# Altium PCB bootleg-2.PcbDoc (part 2 of 2)
Units mm, origin at the board's own origin, x right, y up, seen from the top; angles counter-clockwise.
Board outline 284.8 x 94.3 mm, 2 copper layers (Component Side, Bottom Layer), stack 1.571 mm thick; 153 components, 101 nets, 573 pads, 48 vias.
Unrouted connection lines stored in the file: 2.
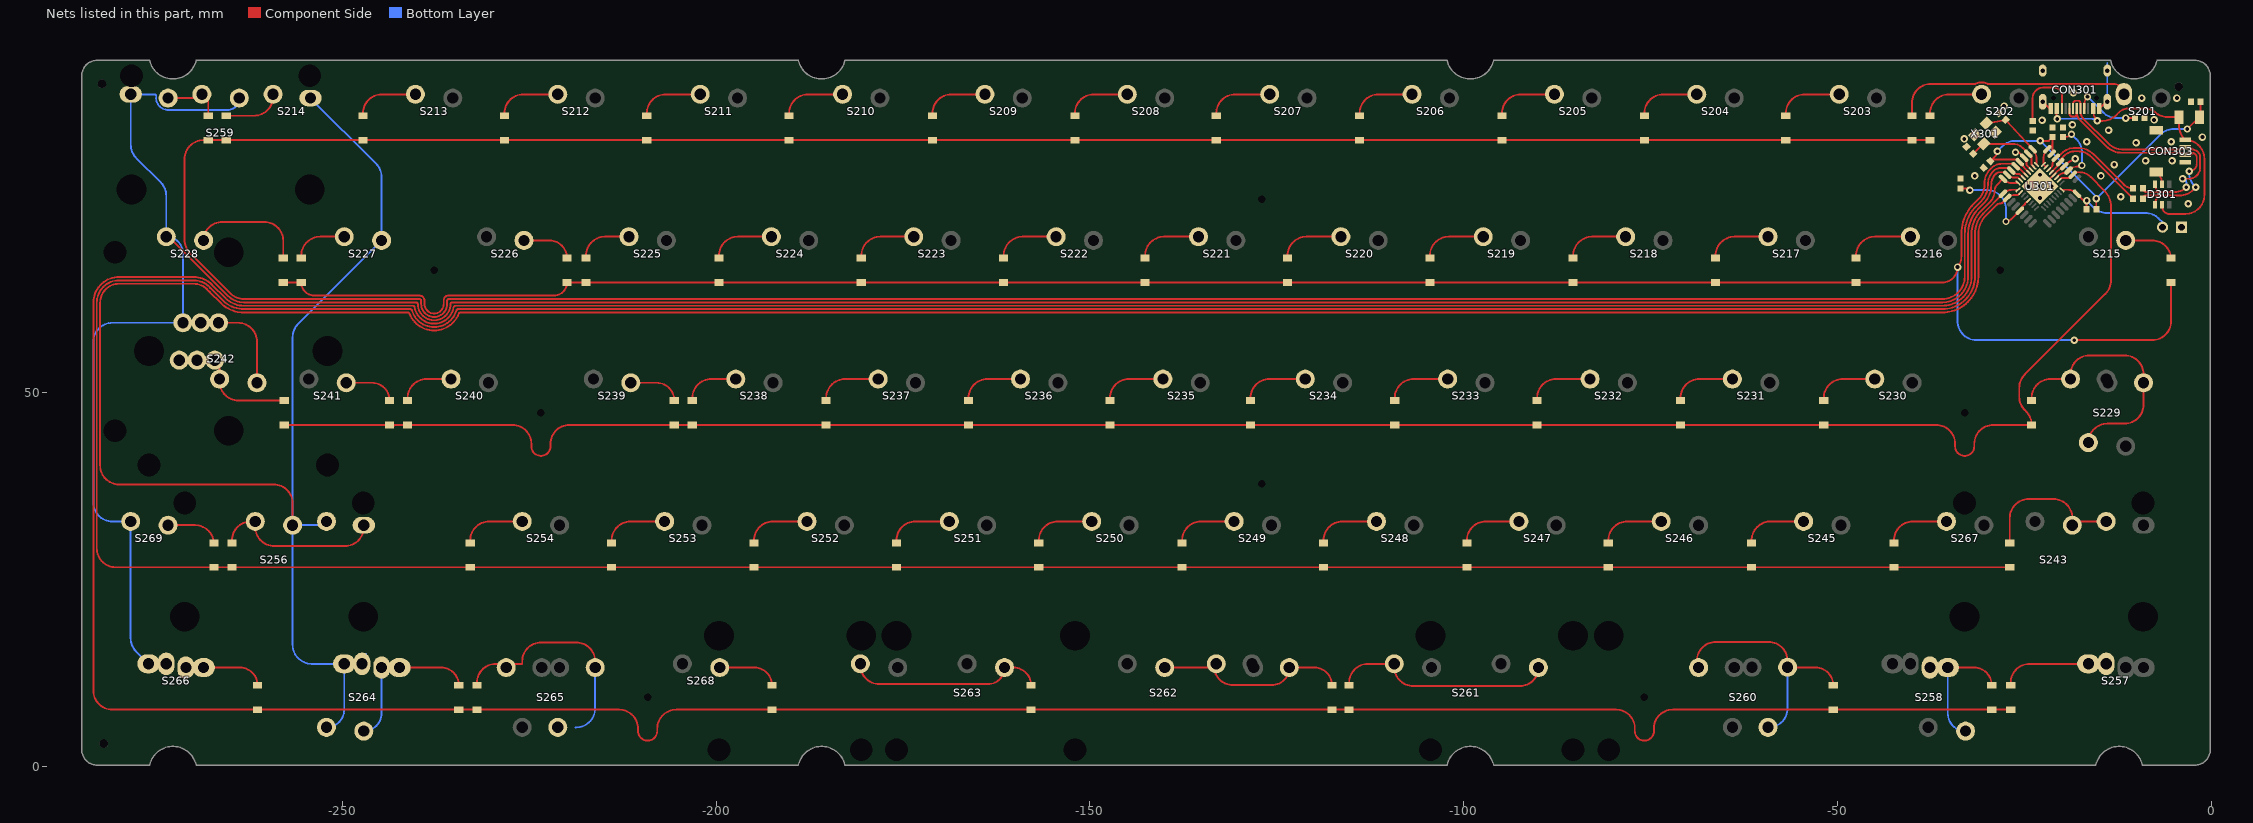
[diagram p2: the nets of this part, all layers, seen from the top]

## Via types
v1: diameter 1, hole 0.5, Component Side to Bottom Layer, tented both sides, 43 vias
v2: diameter 1, hole 0.5, Component Side to Bottom Layer, tented bottom, 5 vias

## Nets (pads, with @x,y where several pads share a name; then routed paths per layer and width w, separated by ;. In a path a pad name is that pad's centre, name@x,y a point inside that pad or via, vN(x,y) a via of type N, cw(c..) or ccw(c..) an arc to the next point about the centre after c; other vN are vias at no path point) (continued)
col14: S214.2 S227.2 S256.1 S264.2 U301.10 | length 432.8
  Component Side w0.254: S256.1@-256.685,32.265 -256.685,35.179 ccw(c-259.225,35.179) -259.225,37.719 -279.9,37.719 cw(c-279.9,40.259) -282.44,40.259 -282.44,62.028 cw(c-279.9,62.028) -281.906,63.587 cw(c-279.9,62.028) -279.9,64.568 -269.932,64.568 cw(c-269.932,62.028) -268.881,64.34 cw(c-269.932,62.028) -268.156,63.844 cw(c-268.334,63.663) -268.113,63.787 ccw(c-267.716,64.008) -267.937,63.611 cw(c-268.06,63.389) -267.88,63.568 -267.764,63.452 -266.309,61.998 ccw(c-263.229,65.078) -264.379,60.877 ccw(c-263.229,65.078) -263.229,60.722 -241.29,60.722 cw(c-241.289,60.468) -241.053,60.561 ccw(c-237.75,61.865) -234.447,60.561 cw(c-234.211,60.468) -234.21,60.722 -35.947,60.722 ccw(c-35.947,65.532) -33.719,61.269 ccw(c-35.947,65.532) -31.684,63.304 ccw(c-35.947,65.532) -31.137,65.532 -31.137,71.245 cw(c-27.689,71.245) -30.127,73.683 -28.711,75.1 cw(c-28.2,74.589) -28.2,75.311 ccw(c-28.2,75.77) -27.875,75.446 U301.10@-27.276,76.045 ; U301.10@-27.276,76.045 cw(c-26.288,75.056) -26.288,76.454 -25.806,76.454 U301.10@-25.473,76.787
  Bottom Layer w0.254: S214.2@-254.306,89.415 -245.525,80.634 cw(c-247.321,78.838) -244.781,78.838 S227.2@-244.781,70.365 -255.941,59.205 ccw(c-254.145,57.409) -256.685,57.409 S256.1@-256.685,32.265 ; S264.2@-252.161,5.215 ccw(c-252.161,7.596) -249.78,7.596 S264.2@-249.78,13.715 -254.145,13.715 cw(c-254.145,16.255) -256.685,16.255 S256.1@-256.685,32.265 ; S256.1@-252.16,32.765 cw(c-253.367,33.972) -253.367,32.265 S256.1@-256.685,32.265 ; S264.2@-247.399,13.715 cw(c-245.549,13.715) S264.2@-246.857,15.023 ; S264.2@-247.362,13.715 S264.2@-247.188,13.889
col15: S228.2 S242.1 S259.2 S266.2 S269.2 U301.7 | length 393
  Component Side w0.254: S259.2@-278.356,89.915 S259.2@-278.356,90.043 ; S259.2@-278.35,89.915 S259.2@-277.538,89.915 ; S228.2@-273.593,70.865 -273.251,70.865 -265.346,62.961 ; S242.1@-266.605,59.345 -263.996,59.345 cw(c-263.996,56.805) -261.456,56.805 S242.1@-261.456,51.315 ; -265.346,62.96 ccw(c-263.229,65.078) -263.229,62.084 -240.194,62.084 cw(c-240.193,61.83) -239.939,61.834 ccw(c-237.75,61.865) -235.561,61.834 cw(c-235.307,61.83) -235.306,62.084 -35.947,62.084 ccw(c-35.947,65.532) -34.522,62.392 ccw(c-35.947,65.532) -32.807,64.107 ccw(c-35.947,65.532) -32.499,65.532 -32.499,71.245 cw(c-27.689,71.245) -31.092,74.645 cw(c-27.689,71.245) -31.09,74.646 -30.426,75.31 ccw(c-32.864,77.748) -29.416,77.748 cw(c-27.079,77.748) -28.997,79.084 ; S259.2@-263.831,89.415 S259.2@-263.831,90.043 ; -29.029,79.051 -28.997,79.084 ; U301.7@-27.648,79.493 -28.159,79.493 ccw(c-28.159,78.456) -28.892,79.189 -28.997,79.084 ; U301.7@-27.368,79.248 U301.7@-27.276,79.156 ; U301.7@-27.276,79.156 ccw(c-26.402,80.03) -26.402,78.794 -25.841,78.794 -25.473,78.426 U301.7@-25.473,78.413
  Bottom Layer w0.254: S266.2@-275.974,13.715 -277.612,15.353 cw(c-275.816,17.149) -278.356,17.149 S269.2@-278.356,32.765 -280.808,32.765 cw(c-280.808,35.305) -283.348,35.305 -283.348,56.805 cw(c-280.808,56.805) -280.808,59.345 S242.1@-271.367,59.345 -271.367,68.639 ccw(c-273.593,68.639) S228.2@-273.593,70.865 -273.593,76.326 ccw(c-276.133,76.326) -274.337,78.122 -277.606,81.391 cw(c-275.81,83.187) -278.35,83.187 S259.2@-278.35,89.915 -275.186,89.915 cw(c-275.185,89.661) -274.933,89.627 ccw(c-273.35,89.415) -273.278,87.82 ; -273.428,87.82 ccw(c-273.35,89.415) -273.278,87.82 ; S259.2@-263.825,89.415 cw(c-265.42,89.415) -265.42,87.82 -273.265,87.82 ccw(c-273.266,87.566) -273.276,87.82 ccw(c-273.266,87.566) -273.278,87.82
D_N: CON301.A7 CON301.B7 CON303.2 D301.3 R305.2 | length 36.5
  Component Side w0.254: CON301.A7@-18.456,88 -18.433,88.735 cw(c-18.106,88.725) -18.106,89.052 -17.806,89.052 cw(c-17.806,88.725) -17.479,88.735 CON301.B7@-17.456,88 ccw(c-17.404,87.948) -17.477,87.948 -17.477,87.54 ccw(c-16.336,87.54) -17.143,86.733 -13.704,83.294 ccw(c-11.908,85.09) -11.908,82.55 -9.779,82.55 -7.366,82.55 -7.366,82.816 -6.604,82.816 -6.604,82.55 -5.715,82.55 -4.048,82.55 ccw(c-4.048,83.417) CON303.2@-3.435,82.804 -2.804,82.804 cw(c-2.804,82.533) -2.533,82.533 cw(c-2.533,81.453) -1.454,81.453 -1.454,80.137 cw(c-2.978,80.137) -2.978,78.613 v1(-3.816,78.613) ; R305.2@-9.135,77.343 ccw(c-8.627,77.343) -8.627,76.835 -6.605,76.835 ; D301.3@-7.494,77.724 ccw(c-6.605,77.724) -6.605,76.835 ; v1(-3.308,77.47) cw(c-4.841,79.003) -4.841,76.835 -6.605,76.835
  Bottom Layer w0.254: v1(-3.816,78.613) cw(c-3.816,78.105) -3.308,78.105 v1(-3.308,77.47)
D_P: CON301.A6 CON301.B6 CON303.3 D301.4 R306.2 | length 36.5
  Component Side w0.254: CON301.B6@-18.956,88 -18.933,87.265 ccw(c-18.606,87.275) -18.606,86.948 -18.306,86.948 ccw(c-18.306,87.275) -17.979,87.265 CON301.A6@-17.956,88 cw(c-18.008,87.948) -17.935,87.948 -17.935,87.324 ccw(c-16.858,87.324) -17.619,86.563 -14.027,82.971 ccw(c-11.908,85.09) -11.908,82.093 -4.132,82.093 cw(c-4.132,81.107) CON303.3@-3.435,81.804 -2.804,81.804 ccw(c-2.804,82.075) -2.533,82.075 cw(c-2.533,81.453) -1.911,81.453 -1.911,80.645 cw(c-2.927,80.645) v1(-2.927,79.629) ; R306.2@-9.135,75.946 cw(c-8.703,75.946) -8.703,76.378 -6.44,76.378 ; D301.4@-7.494,75.324 cw(c-6.44,75.324) -6.44,76.378 ; v1(-2.038,77.47) -2.386,77.122 cw(c-4.182,78.918) -4.182,76.378 -6.44,76.378
  Bottom Layer w0.254: v1(-2.927,79.629) -2.927,79.411 ccw(c-0.387,79.411) -2.406,77.87 ccw(c-0.387,79.411) -2.183,77.615 v1(-2.038,77.47)
D_PRE_N: R305.1 U301.30 | length 14.7
  Component Side w0.254: U301.30@-21.725,79.828 -21.342,80.211 ccw(c-21.65,80.518) -21.215,80.518 cw(c-20.113,80.518) -20.892,81.297 U301.30@-20.771,81.419 ccw(c-20.771,81.849) -20.467,81.545 -20.021,81.991 ; -20.014,81.984 -19.989,82.009 cw(c-18.193,80.213) -18.193,82.753 -17.834,82.753 cw(c-17.834,79.756) -15.714,81.875 -11.71,77.871 ccw(c-10.435,79.146) R305.1@-10.435,77.343
D_PRE_P: R306.1 U301.29 | length 14.8
  Component Side w0.254: U301.29@-21.372,79.474 -20.355,80.491 ccw(c-20.717,80.853) U301.29@-20.205,80.853 cw(c-19.526,80.853) -20.006,81.333 -19.685,81.655 ; -19.691,81.661 cw(c-18.158,80.128) -18.158,82.296 -17.834,82.296 cw(c-17.834,79.756) -16.038,81.552 -11.205,76.719 -11.205,76.716 R306.1@-10.435,75.946
GND: C301.1 C302.1 C303.1 C304.1 C305.1 C306.1 CON301.A1B12 CON301.B1A12 CON301.S1 CON302.1 CON303.4 CON303.5 D301.2 R302.2 R303.2 R304.2 U301.3 U301.28 X301.2 X301.4 | length 18.8
  Component Side w0.254: C302.1@-30.438,79.778 C302.1@-30.438,80.058 ; v1(-26.168,82.169) -25.764,82.169 U301.3@-25.013,81.419 -24.896,81.301 cw(c-25.424,80.772) -24.773,81.139 cw(c-25.424,80.772) -24.677,80.772 -24.677,80.445 U301.3@-24.059,79.828 ; v2(-22.892,77.6) -22.538,77.6 U301.28@-21.018,79.121 -19.851,80.287 U301.28@-19.639,80.287 -19.292,80.634 cw(c-18.04,79.382) v1@-18.04,81.153 ; CON301.S1@-22.526,88.915 -21.721,88.11 ccw(c-21.456,88.374) CON301.B1A12@-21.456,88 ; CON301.A1B12@-14.956,88 -14.151,88.805 cw(c-13.886,88.541) CON301.S1@-13.886,88.915 ; CON303.5@-7.31,79.504 -7.137,79.331 cw(c-8.57,77.899) D301.2@-6.544,77.899
  Bottom Layer w0.254: CON301.S1@-13.886,89.915 -13.886,94.095
  other v1: -3.046,75.283 -12.071,76.2 -31.629,78.994 -14.738,78.994 -12.96,80.518 -8.763,81.026 -5.213,81.026 -18.167,81.28 -10.033,83.439 -16.643,83.566 -5.34,83.566 -33.02,83.947 -1.149,84.201 -13.716,85.09 -18.542,85.852 -22.617,86.431 -7.62,86.487 -27.697,88.336 -9.271,89.408 -4.572,89.408 -18.416,90.123
  other v2: -22.892,76.045 -24.448,77.6 -21.336,77.6 -22.892,79.156
NetC301_2: C301.2 U301.27 | length 9.7
  Component Side w0.254: U301.27@-20.665,78.767 -20.311,79.121 ; -20.31,79.122 cw(c-19.697,78.508) -19.697,79.375 -19.42,79.375 U301.27@-19.074,79.722 cw(c-17.764,78.412) -17.764,80.264 v1@-17.405,80.264 ; C301.2@-19.818,84.186 -19.631,84.186 ccw(c-19.631,85.538) v1(-18.675,84.582)
  Bottom Layer w0.254: v1(-18.675,84.582) -18.022,83.929 cw(c-19.818,82.133) -17.278,82.133 v1(-17.278,80.391)
NetC305_2: C305.2 U301.2 X301.3 | length 10.1
  Component Side w0.254: C305.2@-31.804,81.963 X301.3@-30.687,83.081 ; X301.3@-30.414,83.274 -26.482,83.274 cw(c-26.482,81.476) -25.211,82.747 U301.2@-24.448,81.984 -24.016,81.552 -24.016,80.492 U301.2@-23.705,80.181
NetC306_2: C306.2 U301.1 X301.1 | length 10.1
  Component Side w0.254: X301.1@-30.061,86.032 C306.2@-27.492,86.479 U301.1@-23.882,82.55 cw(c-25.162,81.27) -23.352,81.27 U301.1@-23.352,80.535
NetCON301_A5: CON301.A5 R304.1 | length 9.2
  Component Side w0.254: CON301.A5@-16.956,88 -16.956,88.585 cw(c-15.433,88.585) v1@-16.51,89.662 ; v1(-11.43,86.741) R304.1@-10.175,86.741
  Bottom Layer w0.254: v1(-16.532,89.583) -14.434,87.485 ccw(c-12.638,89.281) -12.638,86.741 v1(-11.43,86.741)
NetCON301_B5: CON301.B5 R303.1 | length 10.1
  Component Side w0.254: R303.1@-23.876,86.375 -23.876,89.408 cw(c-22.479,89.408) -22.479,90.805 -21.082,90.805 cw(c-21.082,89.662) -19.939,89.662 -19.939,88 CON301.B5@-19.956,88
NetD201_1: D201.1 S201.1 | length 32.4
  Component Side w0.254: D201.1@-40.016,87.05 -40.016,88.773 cw(c-37.476,88.773) -37.476,91.313 -31.541,91.313 ccw(c-31.541,91.567) -31.426,91.34 cw(c-30.706,89.915) -29.986,91.34 ccw(c-29.871,91.567) -29.871,91.313 -21.717,91.313 -13.054,91.313 cw(c-13.054,89.915) S201.1@-11.656,89.915
NetD202_1: D202.1 S202.1 | length 8.7
  Component Side w0.254: D202.1@-37.598,87.05 -37.598,87.375 cw(c-35.058,87.375) -35.058,89.915 S202.1@-30.706,89.915
NetD203_1: D203.1 S203.1 | length 8.6
  Component Side w0.254: D203.1@-56.902,87.375 cw(c-54.362,87.375) -54.362,89.915 S203.1@-49.756,89.915
NetD204_1: D204.1 S204.1 | length 8.5
  Component Side w0.254: D204.1@-75.825,87.375 cw(c-73.285,87.375) -73.285,89.915 S204.1@-68.806,89.915
NetD205_1: D205.1 S205.1 | length 8.5
  Component Side w0.254: D205.1@-94.875,87.375 cw(c-92.335,87.375) -92.335,89.915 S205.1@-87.856,89.915
NetD206_1: D206.1 S206.1 | length 8.5
  Component Side w0.254: D206.1@-113.925,87.375 cw(c-111.385,87.375) -111.385,89.915 S206.1@-106.906,89.915
NetD207_1: D207.1 S207.1 | length 8.6
  Component Side w0.254: D207.1@-133.102,87.375 cw(c-130.562,87.375) -130.562,89.915 S207.1@-125.956,89.915
NetD208_1: D208.1 S208.1 | length 8.5
  Component Side w0.254: D208.1@-152.025,87.375 cw(c-149.485,87.375) -149.485,89.915 S208.1@-145.006,89.915
NetD209_1: D209.1 S209.1 | length 8.5
  Component Side w0.254: D209.1@-171.075,87.375 cw(c-168.535,87.375) -168.535,89.915 S209.1@-164.056,89.915
NetD210_1: D210.1 S210.1 | length 8.6
  Component Side w0.254: D210.1@-190.252,87.375 cw(c-187.712,87.375) -187.712,89.915 S210.1@-183.106,89.915
NetD211_1: D211.1 S211.1 | length 8.6
  Component Side w0.254: D211.1@-209.302,87.375 cw(c-206.762,87.375) -206.762,89.915 S211.1@-202.156,89.915
NetD212_1: D212.1 S212.1 | length 8.6
  Component Side w0.254: D212.1@-228.352,87.375 cw(c-225.812,87.375) -225.812,89.915 S212.1@-221.206,89.915
NetD213_1: D213.1 S213.1 | length 8.5
  Component Side w0.254: D213.1@-247.275,87.375 cw(c-244.735,87.375) -244.735,89.915 S213.1@-240.256,89.915
NetD214_1: D214.1 S214.1 | length 8
  Component Side w0.254: D214.1@-265.563,87.05 -261.846,87.05 ccw(c-261.846,89.59) -259.306,89.59 S214.1@-259.306,89.915
NetD215_1: D215.1 S215.1 | length 7.5
  Component Side w0.254: S215.1@-11.418,70.365 -7.88,70.365 cw(c-7.88,67.825) D215.1@-5.34,67.825
NetD216_1: D216.1 S216.1 | length 8.7
  Component Side w0.254: D216.1@-47.504,68.325 cw(c-44.964,68.325) -44.964,70.865 S216.1@-40.231,70.865
NetD217_1: D217.1 S217.1 | length 8.5
  Component Side w0.254: D217.1@-66.3,68.325 cw(c-63.76,68.325) -63.76,70.865 S217.1@-59.281,70.865
NetD218_1: D218.1 S218.1 | length 8.5
  Component Side w0.254: D218.1@-85.35,68.325 cw(c-82.81,68.325) -82.81,70.865 S218.1@-78.331,70.865
NetD219_1: D219.1 S219.1 | length 8.6
  Component Side w0.254: D219.1@-104.527,68.325 cw(c-101.987,68.325) -101.987,70.865 S219.1@-97.381,70.865
NetD220_1: D220.1 S220.1 | length 8.6
  Component Side w0.254: D220.1@-123.577,68.325 cw(c-121.037,68.325) -121.037,70.865 S220.1@-116.431,70.865
NetD221_1: D221.1 S221.1 | length 8.6
  Component Side w0.254: D221.1@-142.627,68.325 cw(c-140.087,68.325) -140.087,70.865 S221.1@-135.481,70.865
NetD222_1: D222.1 S222.1 | length 8.5
  Component Side w0.254: D222.1@-161.55,68.325 cw(c-159.01,68.325) -159.01,70.865 S222.1@-154.531,70.865
NetD223_1: D223.1 S223.1 | length 8.5
  Component Side w0.254: D223.1@-180.6,68.325 cw(c-178.06,68.325) -178.06,70.865 S223.1@-173.581,70.865
NetD224_1: D224.1 S224.1 | length 8.5
  Component Side w0.254: D224.1@-199.65,68.325 cw(c-197.11,68.325) -197.11,70.865 S224.1@-192.631,70.865
NetD225_1: D225.1 S225.1 | length 7.5
  Component Side w0.254: D225.1@-217.435,68 -217.435,68.325 cw(c-214.895,68.325) -214.895,70.865 S225.1@-211.681,70.865
NetD226_1: D226.1 S226.1 | length 7.1
  Component Side w0.254: S226.1@-225.731,70.365 -222.34,70.365 cw(c-222.34,68) D226.1@-219.975,68
NetD227_1: D227.1 S227.1 | length 7.5
  Component Side w0.254: D227.1@-255.535,68 -255.535,68.325 cw(c-252.995,68.325) -252.995,70.865 S227.1@-249.781,70.865
NetD228_1: D228.1 S228.1 | length 15.8
  Component Side w0.254: S228.1@-268.593,70.365 cw(c-266.116,70.365) -266.116,72.842 -260.483,72.842 cw(c-260.483,70.302) -257.943,70.302 D228.1@-257.943,68
NetD229_1: D229.1 S229.1 | length 34.6
  Component Side w0.254: D229.1@-24.009,48.95 -24.009,49.275 cw(c-21.469,49.275) -21.469,51.815 S229.1@-18.8,51.815 -18.8,52.451 cw(c-16.26,52.451) -16.26,54.991 -11.577,54.991 cw(c-11.577,52.451) -9.037,52.451 S229.1@-9.037,51.315 -9.037,48.387 cw(c-11.577,48.387) -11.577,45.847 -13.887,45.847 ccw(c-13.887,43.315) S229.1@-16.418,43.315
NetD230_1: D230.1 S230.1 | length 8.3
  Component Side w0.254: D230.1@-51.822,49.275 cw(c-49.282,49.275) -49.282,51.815 S230.1@-44.993,51.815
NetD231_1: D231.1 S231.1 | length 8.4
  Component Side w0.254: D231.1@-70.999,49.275 cw(c-68.459,49.275) -68.459,51.815 S231.1@-64.043,51.815
NetD232_1: D232.1 S232.1 | length 8.5
  Component Side w0.254: D232.1@-90.176,49.275 cw(c-87.636,49.275) -87.636,51.815 S232.1@-83.093,51.815
NetD233_1: D233.1 S233.1 | length 8.5
  Component Side w0.254: D233.1@-109.226,49.275 cw(c-106.686,49.275) -106.686,51.815 S233.1@-102.143,51.815
NetD234_1: D234.1 S234.1 | length 9.6
  Component Side w0.254: D234.1@-128.53,49.275 cw(c-125.99,49.275) -125.99,51.815 S234.1@-121.193,51.815
  Bottom Layer w0.254: S234.1@-121.799,51.83 -121.503,52.125 S234.1@-121.233,52.395
NetD235_1: D235.1 S235.1 | length 8.5
  Component Side w0.254: D235.1@-147.326,49.275 cw(c-144.786,49.275) -144.786,51.815 S235.1@-140.243,51.815
NetD236_1: D236.1 S236.1 | length 8.4
  Component Side w0.254: D236.1@-166.249,49.275 cw(c-163.709,49.275) -163.709,51.815 S236.1@-159.293,51.815
NetD237_1: D237.1 S237.1 | length 8.4
  Component Side w0.254: D237.1@-185.299,49.275 cw(c-182.759,49.275) -182.759,51.815 S237.1@-178.343,51.815
NetD238_1: D238.1 S238.1 | length 7.6
  Component Side w0.254: D238.1@-203.211,48.95 -203.211,49.275 cw(c-200.671,49.275) -200.671,51.815 S238.1@-197.393,51.815
NetD239_1: D239.1 S239.1 | length 7.2
  Component Side w0.254: S239.1@-211.443,51.315 -207.989,51.315 cw(c-207.989,48.95) D239.1@-205.624,48.95
NetD240_1: D240.1 S240.1 | length 7.6
  Component Side w0.254: D240.1@-241.3,48.95 -241.3,49.275 cw(c-238.76,49.275) -238.76,51.815 S240.1@-235.493,51.815
NetD241_1: D241.1 S241.1 | length 7.2
  Component Side w0.254: S241.1@-249.518,51.315 -246.078,51.315 cw(c-246.078,48.95) D241.1@-243.713,48.95
NetD242_1: D242.1 S242.2 | length 13.3
  Component Side w0.254: S242.2@-267.105,54.345 cw(c-267.105,53.696) -266.456,53.696 S242.2@-266.456,51.815 -266.456,51.49 ccw(c-263.916,51.49) -263.916,48.95 D242.1@-257.81,48.95
NetD243_1: D243.1 S243.2 | length 20.4
  Component Side w0.254: D243.1@-26.935,29.9 -26.935,33.218 cw(c-24.395,33.218) -24.395,35.758 -21.102,35.758 cw(c-21.102,33.218) -18.562,33.218 S243.2@-18.562,32.265 cw(c-18.062,32.265) -18.062,32.765 S243.2@-14.037,32.765
NetD245_1: D245.1 S245.1 | length 8.4
  Component Side w0.254: D245.1@-61.474,30.225 cw(c-58.934,30.225) -61.398,30.841 cw(c-58.934,30.225) -59.55,32.689 cw(c-58.934,30.225) -58.934,32.765 S245.1@-54.518,32.765
NetD246_1: D246.1 S246.1 | length 8.5
  Component Side w0.254: D246.1@-80.651,30.225 cw(c-78.111,30.225) -78.111,32.765 S246.1@-73.568,32.765
NetD247_1: D247.1 S247.1 | length 8.4
  Component Side w0.254: D247.1@-99.574,30.225 cw(c-97.034,30.225) -97.034,32.765 S247.1@-92.618,32.765
NetD248_1: D248.1 S248.1 | length 8.5
  Component Side w0.254: D248.1@-118.751,30.225 cw(c-116.211,30.225) -116.211,32.765 S248.1@-111.668,32.765
NetD249_1: D249.1 S249.1 | length 8.4
  Component Side w0.254: D249.1@-137.674,30.225 cw(c-135.134,30.225) -135.134,32.765 S249.1@-130.718,32.765
NetD250_1: D250.1 S250.1 | length 8.5
  Component Side w0.254: D250.1@-156.851,30.225 cw(c-154.311,30.225) -154.311,32.765 S250.1@-149.768,32.765
NetD251_1: D251.1 S251.1 | length 8.5
  Component Side w0.254: D251.1@-175.901,30.225 cw(c-173.361,30.225) -173.361,32.765 S251.1@-168.818,32.765
NetD252_1: D252.1 S252.1 | length 8.5
  Component Side w0.254: D252.1@-194.951,30.225 cw(c-192.411,30.225) -192.411,32.765 S252.1@-187.868,32.765
NetD253_1: D253.1 S253.1 | length 8.5
  Component Side w0.254: D253.1@-214.001,30.225 cw(c-211.461,30.225) -211.461,32.765 S253.1@-206.918,32.765
NetD254_1: D254.1 S254.1 | length 8.7
  Component Side w0.254: D254.1@-232.924,29.9 -232.924,30.225 cw(c-230.384,30.225) -230.384,32.765 S254.1@-225.968,32.765
NetD256_1: D256.1 S256.2 | length 23.3
  Component Side w0.254: D256.1@-264.806,29.9 -264.806,30.225 cw(c-262.266,30.225) -262.266,32.765 S256.2@-261.685,32.765 -261.685,32.004 ccw(c-259.145,32.004) -259.145,29.464 -249.7,29.464 ccw(c-249.7,32.004) -247.16,32.004 S256.2@-247.16,32.265
NetD257_1: D257.1 S257.2 | length 12.2
  Component Side w0.254: D257.1@-26.808,10.85 -26.808,11.175 cw(c-24.268,11.175) -24.268,13.715 S257.2@-16.418,13.715
NetD258_1: D258.1 S258.1 | length 18.7
  Component Side w0.254: S258.1@-37.638,12.405 S258.1@-37.638,13.215 ; S258.1@-35.23,12.405 S258.1@-35.23,13.215 -31.713,13.215 cw(c-31.713,10.85) D258.1@-29.348,10.85
  Bottom Layer w0.254: S258.1@-35.23,13.215 -35.23,7.096 ccw(c-32.849,7.096) S258.1@-32.849,4.715
NetD259_1: D259.1 S259.1 | length 9
  Component Side w0.254: S259.1@-273.356,88.605 -273.356,89.415 S259.1@-273.35,89.415 -269.331,89.415 ccw(c-269.331,89.915) S259.1@-268.831,89.915 ; S259.1@-268.825,89.915 cw(c-268.825,89.072) -267.981,89.072 D259.1@-267.981,87.05
NetD260_1: D260.1 S260.1 | length 33.3
  Component Side w0.254: S260.1@-68.805,13.715 -68.805,14.097 cw(c-66.265,14.097) -66.265,16.637 -59.202,16.637 cw(c-59.202,14.097) -56.662,14.097 S260.1@-56.662,13.263 ; S260.1@-56.662,13.215 -52.917,13.215 cw(c-52.917,10.85) D260.1@-50.552,10.85
  Bottom Layer w0.254: S260.1@-59.28,5.215 -59.202,5.215 ccw(c-59.202,7.755) -56.662,7.755 S260.1@-56.662,13.263
NetD261_1: D261.1 S261.1 | length 30.4
  Component Side w0.254: D261.1@-115.327,10.85 -115.327,11.175 cw(c-112.787,11.175) -112.787,13.715 S261.1@-109.287,13.715 -109.287,13.279 ccw(c-106.747,13.279) -106.747,10.739 -92.475,10.739 ccw(c-92.475,13.215) S261.1@-89.999,13.215
NetD262_1: D262.1 S262.1 | length 27.1
  Component Side w0.254: S262.1@-140.005,13.215 -133.909,13.215 ccw(c-133.909,13.715) -133.409,13.715 -133.409,13.406 ccw(c-130.869,13.406) -130.869,10.866 -125.678,10.866 ccw(c-125.678,13.215) S262.1@-123.329,13.215 -119.978,13.215 cw(c-119.978,10.85) D262.1@-117.613,10.85
NetD263_1: D263.1 S263.1 | length 27.1
  Component Side w0.254: S263.1@-180.725,13.715 -180.725,13.533 ccw(c-178.185,13.533) -178.185,10.993 -163.659,10.993 ccw(c-163.659,13.215) S263.1@-161.437,13.215 -160.237,13.215 cw(c-160.237,10.85) D263.1@-157.872,10.85
NetD264_1: D264.1 S264.1 | length 19.2
  Component Side w0.254: S264.1@-242.399,13.215 -236.818,13.215 cw(c-236.818,10.85) D264.1@-234.453,10.85
  Bottom Layer w0.254: S264.1@-247.161,4.715 ccw(c-247.161,7.096) -244.78,7.096 S264.1@-244.78,13.215
NetD265_1: D265.1 S265.1 | length 31.2
  Component Side w0.254: D265.1@-232.035,10.85 -232.035,11.175 cw(c-229.495,11.175) -229.495,13.715 -225.968,13.715 -225.968,14.041 cw(c-223.428,14.041) -223.428,16.581 -218.745,16.581 cw(c-218.745,14.041) -216.205,14.041 S265.1@-216.205,13.215
  Bottom Layer w0.254: -218.824,5.215 -218.745,5.215 ccw(c-218.745,7.755) -216.205,7.755 S265.1@-216.205,13.215
NetD266_1: D266.1 S266.1 | length 8.6
  Component Side w0.254: S266.1@-268.593,13.215 -263.737,13.215 cw(c-263.737,10.85) D266.1@-261.372,10.85
NetD267_1: D267.1 S267.1 | length 8.8
  Component Side w0.254: D267.1@-42.429,29.9 -42.429,30.225 cw(c-39.889,30.225) -39.889,32.765 S267.1@-35.399,32.765
NetD268_1: D268.1 S268.2 | length 8.3
  Component Side w0.254: S268.2@-199.537,13.215 -194.908,13.215 cw(c-194.908,10.85) D268.1@-192.543,10.85
NetD269_1: D269.1 S269.1 | length 7.6
  Component Side w0.254: S269.1@-273.356,32.265 -269.754,32.265 cw(c-269.754,29.725) D269.1@-267.214,29.725
NetR302_1: R302.1 U301.13 | length 13.7
  Component Side w0.254: R302.1@-33.534,77.328 -32.841,77.328 cw(c-32.841,76.512) v1(-32.264,77.089) ; v1@-27.565,72.898 ccw(c-27.565,74.193) -26.649,73.277 U301.13@-25.579,74.348 -25.579,74.503 -24.898,75.184 -24.898,75.241 U301.13@-24.412,75.726
  Bottom Layer w0.254: v1(-32.264,77.089) -29.978,77.089 cw(c-29.978,74.549) -27.438,74.549 v1(-27.438,72.898)
PC2: D215.2 D216.2 D217.2 D218.2 D219.2 D220.2 D221.2 D222.2 D223.2 D224.2 D225.2 D226.2 D227.2 D228.2 U301.5 | length 293.8
  Component Side w0.254: D228.2@-257.943,64.73 D227.2@-255.535,64.73 ccw(c-253.797,64.73) -253.797,62.992 -239.743,62.992 cw(c-239.741,62.284) -239.034,62.32 ; -239.034,62.32 cw(c-241.571,62.19) -239.031,62.19 -239.031,61.865 ccw(c-237.75,61.865) -236.469,61.865 -236.469,62.362 cw(c-235.839,62.362) -235.839,62.992 -235.492,62.992 -232.791,62.992 -221.713,62.992 ccw(c-221.713,64.73) D226.2@-219.975,64.73 D225.2@-217.435,64.73 D224.2@-199.65,64.73 D223.2@-180.6,64.73 D222.2@-161.55,64.73 D221.2@-142.627,64.73 D220.2@-123.577,64.73 D219.2@-104.527,64.73 D218.2@-85.35,64.73 D217.2@-66.3,64.73 D216.2@-47.504,64.73 -35.987,64.73 ccw(c-35.987,66.802) v1@-33.916,66.729 ; v1(-33.915,66.802) cw(c-35.987,66.802) v1@-33.916,66.729 ; U301.5@-26.425,80.624 -27.946,80.624 ccw(c-27.946,78.542) -29.418,80.014 -29.556,79.877 ccw(c-27.701,78.022) -30.324,78.022 -30.324,77.748 cw(c-32.864,77.748) -31.068,75.952 -31.732,75.288 ccw(c-27.689,71.245) -31.734,75.286 ccw(c-27.689,71.245) -33.407,71.245 -33.407,68.255 cw(c-35.947,68.255) v1@-33.916,66.729 ; U301.5@-26.145,80.287 -25.933,80.287 U301.5@-24.766,79.121 ; v1(-18.294,57.023) -7.88,57.023 ccw(c-7.88,59.563) -5.34,59.563 D215.2@-5.34,64.73
  Bottom Layer w0.254: v1(-33.915,66.802) -33.915,59.563 ccw(c-31.375,59.563) -31.375,57.023 v1(-18.294,57.023)
PC4: D229.2 D230.2 D231.2 D232.2 D233.2 D234.2 D235.2 D236.2 D237.2 D238.2 D239.2 D240.2 D241.2 D242.2 U301.26 | length 288.1
  Component Side w0.254: D242.2@-257.81,45.68 D241.2@-243.419,45.68 ; D241.2@-243.205,45.466 ccw(c-243.419,45.466) D241.2@-243.419,45.68 ; U301.26@-20.311,78.413 -19.985,78.74 -18.924,78.74 U301.26@-18.508,79.156 ; U301.26@-18.228,79.493 -17.639,79.493 cw(c-17.639,77.356) -16.128,78.867 -14.272,77.011 ; -14.271,77.01 cw(c-16.389,74.894) -13.395,74.894 -13.395,65.006 cw(c-15.935,65.006) -14.139,63.21 -24.916,52.433 ccw(c-23.12,50.637) -25.66,50.637 -25.66,49.445 ccw(c-23.12,49.445) -24.916,47.649 -24.753,47.486 cw(c-26.549,45.69) -24.009,45.69 D229.2@-24.009,45.68 -29.141,45.68 ccw(c-29.141,43.14) -31.681,43.14 -31.681,42.815 cw(c-32.962,42.815) -34.243,42.815 -34.243,43.14 ccw(c-36.783,43.14) -36.783,45.68 D230.2@-51.822,45.68 D231.2@-70.999,45.68 D232.2@-90.176,45.68 D233.2@-109.226,45.68 D234.2@-128.53,45.68 D235.2@-147.326,45.68 D236.2@-166.249,45.68 D237.2@-185.299,45.68 D238.2@-203.211,45.68 D239.2@-205.624,45.68 -219.641,45.68 ccw(c-219.641,43.14) -222.181,43.14 -222.181,42.815 cw(c-223.462,42.815) -224.743,42.815 -224.743,43.14 ccw(c-227.283,43.14) -227.283,45.68 D240.2@-241.3,45.68 D241.2@-243.419,45.68
PD0: D201.2 D202.2 D203.2 D204.2 D205.2 D206.2 D207.2 D208.2 D209.2 D210.2 D211.2 D212.2 D213.2 D214.2 D259.2 U301.6 | length 512.3
  Component Side w0.254: D202.2@-37.598,83.78 D201.2@-40.016,83.78 D203.2@-56.902,83.78 D204.2@-75.825,83.78 D205.2@-94.875,83.78 D206.2@-113.925,83.78 D207.2@-133.102,83.78 D208.2@-152.025,83.78 D209.2@-171.075,83.78 D210.2@-190.252,83.78 D211.2@-209.302,83.78 D212.2@-228.352,83.78 D213.2@-247.275,83.78 D214.2@-265.563,83.78 D259.2@-267.981,83.78 -268.611,83.78 ccw(c-268.611,81.24) -271.151,81.24 -271.151,70.46 ccw(c-268.611,70.46) -270.407,68.664 -265.025,63.282 ccw(c-263.229,65.078) -263.229,62.538 -239.743,62.538 cw(c-239.741,62.284) -239.488,62.296 cw(c-241.571,62.19) -239.485,62.19 -239.485,61.865 ccw(c-237.75,61.865) -236.015,61.865 -236.015,62.19 cw(c-233.929,62.19) -236.012,62.298 cw(c-235.759,62.284) -235.757,62.538 -35.947,62.538 ccw(c-35.947,65.532) -34.782,62.774 ccw(c-35.947,65.532) -33.189,64.367 ccw(c-35.947,65.532) -32.953,65.532 -32.953,71.245 cw(c-27.689,71.245) -31.411,74.967 -30.747,75.631 ; -30.746,75.632 ccw(c-32.864,77.748) -29.87,77.748 -29.87,77.807 cw(c-27.22,77.807) -29.094,79.68 cw(c-28.182,78.769) -28.182,80.058 -27.047,80.058 U301.6@-26.71,79.722 -26.462,79.473 ccw(c-25.919,80.016) -25.919,79.248 -25.6,79.248 U301.6@-25.119,78.767
PD2: D257.2 D258.2 D260.2 D261.2 D262.2 D263.2 D264.2 D265.2 D266.2 D268.2 U301.8 | length 595.8
  Component Side w0.254: -77.072,4.419 cw(c-75.825,4.715) -77.106,4.715 ; -74.544,5.395 -74.544,4.715 cw(c-75.825,4.715) -77.106,4.715 ; -74.544,5.396 cw(c-74.29,5.395) -74.541,5.435 cw(c-72.032,5.04) -72.032,7.58 D260.2@-50.552,7.58 D258.2@-29.348,7.58 D257.2@-27.184,7.58 ; -28.603,77.829 ccw(c-27.736,76.962) -28.962,76.962 cw(c-30.965,76.962) -29.548,75.546 -30.769,74.325 ccw(c-27.689,71.245) -32.045,71.245 -32.045,65.532 cw(c-35.947,65.532) -32.43,63.842 cw(c-35.947,65.532) -34.257,62.015 cw(c-35.947,65.532) -35.947,61.63 -234.893,61.63 ccw(c-234.895,61.376) -235.145,61.419 cw(c-237.75,61.865) -240.355,61.419 ccw(c-240.605,61.376) -240.607,61.63 -263.229,61.63 cw(c-263.229,65.078) -265.667,62.64 -267.494,64.466 ccw(c-269.932,62.028) -269.932,65.476 -279.9,65.476 ccw(c-279.9,62.028) -283.348,62.028 -283.348,10.12 ccw(c-280.808,10.12) -280.808,7.58 D266.2@-261.372,7.58 D264.2@-234.453,7.58 D265.2@-232.035,7.58 -213.007,7.58 cw(c-213.007,5.04) -210.467,5.04 -210.467,4.715 ccw(c-209.185,4.715) -207.904,4.715 -207.904,5.04 cw(c-205.364,5.04) -205.364,7.58 D268.2@-192.543,7.58 D263.2@-157.872,7.58 D262.2@-117.613,7.58 D261.2@-115.327,7.58 -79.612,7.58 cw(c-79.612,5.04) -77.11,5.48 cw(c-77.36,5.437) -77.106,5.438 cw(c-77.36,5.437) -77.106,5.436 -77.106,4.715 ; -28.603,77.829 U301.8@-27.842,78.59 -27.715,78.463 ccw(c-26.741,79.437) -26.741,78.06 U301.8@-25.827,78.06
PD3: D243.2 D245.2 D246.2 D247.2 D248.2 D249.2 D250.2 D251.2 D252.2 D253.2 D254.2 D256.2 D267.2 D269.2 U301.9 | length 564.1
  Component Side w0.254: -267.716,64.009 ccw(c-267.957,63.928) -267.778,64.109 -267.814,64.144 ccw(c-269.932,62.028) -269.932,65.022 -279.9,65.022 ccw(c-279.9,62.028) -281.785,64.354 ccw(c-279.9,62.028) -282.545,63.431 ccw(c-279.9,62.028) -282.894,62.028 -282.894,35.179 -282.895,30.734 -282.895,29.17 ccw(c-280.355,29.17) -282.895,29.169 ccw(c-280.355,29.17) -280.355,26.63 D269.2@-267.214,26.63 D256.2@-264.806,26.63 D254.2@-233.079,26.63 ; -267.716,64.008 cw(c-267.796,63.767) -267.615,63.946 -266.109,62.44 -265.988,62.319 ccw(c-263.229,65.078) -265.487,61.895 ccw(c-263.229,65.078) -264.829,61.519 ccw(c-263.229,65.078) -263.229,61.176 -240.967,61.176 cw(c-240.966,60.922) -240.722,60.993 ccw(c-237.75,61.865) -234.778,60.993 cw(c-234.534,60.922) -234.533,61.176 -35.947,61.176 ccw(c-35.947,65.532) -33.989,61.641 ccw(c-35.947,65.532) -32.056,63.574 ccw(c-35.947,65.532) -31.591,65.532 -31.591,71.245 cw(c-27.689,71.245) -30.449,74.003 cw(c-27.689,71.245) -30.448,74.004 U301.9@-27.842,76.61 ; D254.2@-232.924,26.973 D254.2@-232.924,26.63 D253.2@-214.001,26.63 D252.2@-194.951,26.63 D251.2@-175.901,26.63 D250.2@-156.851,26.63 D249.2@-137.674,26.63 D248.2@-118.751,26.63 D247.2@-99.574,26.63 D246.2@-80.651,26.63 D245.2@-61.474,26.63 D267.2@-42.429,26.63 D243.2@-26.935,26.63 ; U301.9@-27.842,76.61 cw(c-26.561,75.33) -26.561,77.141 U301.9@-25.827,77.141
RAW: CON301.A4B9 CON301.B4A9 CON303.1 D301.5 F301.2 | length 40.4
  Component Side w0.254: CON301.B4A9@-20.656,88 -20.656,86.812 ccw(c-20.376,86.812) v1(-20.574,86.614) ; CON301.A4B9@-15.756,88 -15.756,87.606 ccw(c-13.994,87.606) v1(-15.24,86.36) -14.514,86.36 ccw(c-14.514,88.9) -12.718,87.104 -12.319,87.503 cw(c-11.093,86.277) -11.093,88.011 -8.718,88.011 cw(c-8.718,86.278) -7.587,87.591 cw(c-8.718,86.278) -7.493,87.504 ccw(c-5.812,89.408) -5.812,86.868 F301.2@-4.277,86.868 -4.277,85.698 ccw(c-1.737,85.698) -3.533,83.902 CON303.1@-3.435,83.804 cw(c-3.435,81.264) -0.895,81.264 -0.895,76.454 cw(c-3.435,76.454) -3.435,73.914 -5.594,73.914 cw(c-5.594,74.864) -6.544,74.864 D301.5@-6.544,75.149
  Bottom Layer w0.254: v1(-20.574,86.614) -18.57,86.679 cw(c-18.542,85.852) -18.52,86.679 -17.773,86.661 -15.859,86.614 ccw(c-15.853,86.868) -15.853,86.614 cw(c-15.853,85.747) v1(-15.24,86.36)
RST: CON302.2 R301.2 U301.24 | length 15.9
  Component Side w0.254: U301.24@-19.958,77.141 -19.223,77.141 cw(c-19.223,75.33) U301.24@-17.942,76.61 ; U301.24@-17.942,76.61 -16.833,75.502 -16.658,75.326 R301.2@-16.658,74.549
  Bottom Layer w0.254: v1(-16.643,75.692) -15.736,74.785 ccw(c-13.94,76.581) -13.94,74.041 -8.805,74.041 cw(c-8.805,71.501) -7.009,73.297 CON302.2@-6.483,72.771
VCC: C302.2 C303.2 C304.2 F301.1 R301.1 U301.4 U301.31 U301.32 | length 54.1
  Component Side w0.254: v1(-28.581,82.296) cw(c-29.501,82.296) -28.85,81.646 C302.2@-29.518,80.978 cw(c-29.006,80.465) -29.006,81.19 -25.916,81.19 U301.4@-25.579,80.853 -25.579,80.706 -25.025,80.152 -25.025,80.087 U301.4@-24.412,79.474 ; v1(-22.866,83.693) -21.708,83.693 C303.2@-21.215,84.186 -21.215,83.237 ; U301.31@-22.079,80.181 U301.32@-22.432,80.535 -22.432,81.27 cw(c-20.622,81.27) U301.32@-21.902,82.55 ; U301.32@-21.902,82.55 -21.215,83.237 ; U301.31@-21.336,81.984 -21.215,82.106 -21.215,82.55 -21.215,83.237 ; R301.1@-15.358,74.549 v1(-15.358,75.961) ; v1(-3.171,85.274) F301.1@-1.577,86.868 ccw(c-2.033,87.324) -1.388,87.324 C304.2@-1.388,88.9
  Bottom Layer w0.254: v1(-28.581,82.296) -27.928,82.949 cw(c-26.132,81.153) -26.132,83.693 v1(-22.866,83.693) -15.358,76.185 v1(-15.358,75.961) -6.789,84.53 cw(c-4.993,82.734) -4.993,85.274 v1(-3.171,85.274)
pads on no net: CON301. CON301.A8 CON301.B8 D301.1 D301.6 S201. S202. S203. S204. S205. S206. S207. S208. S209. S210. S211. S212. S213. S214. S215. S216. S217. S218. S219. S220. S221. S222. S223. S224. S225. S226. S227. S228. S229. S230. S231. S232. S233. S234. S235. S236. S237. S238. S239. S240. S241. S242. S243. S245. S246. S247. S248. S249. S250. S251. S252. S253. S254. S256. S257. S258. S259. S260. S261. S262. S263. S264. S265. S266. S267. S268. S269.
copper on no net: | length 130
  Component Side w0.254: -142.5,16.383 -142.5,24.384 -117.989,24.384 -117.989,16.383 -142.5,16.383
  Bottom Layer w0.254: -142.5,16.383 -117.989,16.383 -117.989,24.384 -142.5,24.384 -142.5,16.383
  other v1: -27.316,84.399

## Polygon pours and split planes (outlines as drawn)
GND on Component Side "Component Side-GND" (hatched 45Degree grid 0.508 track 0.203, remove dead copper, pour order 1): -34.39,76.581 ccw(c-33.02,76.581) -33.02,75.211 -13.164,75.211 cw(c-13.164,73.577) -12.009,74.732 ccw(c-11.018,75.723) -11.018,74.322 -8.763,74.322 cw(c-8.763,71.356) -6.666,73.453 -6.172,72.959 ccw(c-3.943,75.188) -3.943,72.036 -1.651,72.036 ccw(c-1.651,73.406) -0.281,73.406 -0.281,88.646 ccw(c-1.651,88.646) -1.651,90.016 -11.938,90.016 cw(c-11.938,91.186) -13.108,91.186 -13.108,92.964 ccw(c-14.224,92.964) -14.224,94.08 -22.358,94.08 ccw(c-22.358,93.091) -23.347,93.091 -23.347,90.17 ccw(c-23.247,90.17) -23.342,90.137 cw(c-24.511,90.17) -24.511,89 -27.686,89 ccw(c-27.686,85.834) -29.925,88.073 -33.463,84.535 ccw(c-31.224,82.296) -34.39,82.296
GND on Bottom Layer "Bottom Layer-GND" (hatched 45Degree grid 0.508 track 0.203, remove dead copper, pour order 0): -34.39,76.581 ccw(c-33.02,76.581) -33.02,75.211 -13.164,75.211 cw(c-13.164,73.577) -12.009,74.732 ccw(c-11.018,75.723) -11.018,74.322 -8.763,74.322 cw(c-8.763,71.356) -6.666,73.453 -6.172,72.959 ccw(c-3.943,75.188) -3.943,72.036 -1.651,72.036 ccw(c-1.651,73.406) -0.281,73.406 -0.281,88.646 ccw(c-1.651,88.646) -1.651,90.016 -11.938,90.016 cw(c-11.938,91.186) -13.108,91.186 -13.108,92.964 ccw(c-14.224,92.964) -14.224,94.08 -22.358,94.08 ccw(c-22.358,93.091) -23.347,93.091 -23.347,90.17 ccw(c-23.247,90.17) -23.342,90.137 cw(c-24.511,90.17) -24.511,89 -27.686,89 ccw(c-27.686,85.834) -29.925,88.073 -33.463,84.535 ccw(c-31.224,82.296) -34.39,82.296

## Other copper
Component Side:
  pour cut-out: -13.843,94.342 ccw(c-10.306,95.149) -6.76,94.388 ccw(c-6.884,94.415) -6.757,94.415 ccw(c-6.884,94.415) -6.884,94.542 -13.674,94.542 ccw(c-13.674,94.415) -13.783,94.48 ccw(c-13.719,94.37)
  text "BOOTLEG-2" at -140.849,20.193 h5
  text "Rev B1" at -140.722,18.034 h2
  text "by 4pplet" at -128.276,18.034 h2
Bottom Layer:
  pour cut-out: -13.843,94.342 ccw(c-10.306,95.149) -6.76,94.388 ccw(c-6.884,94.415) -6.757,94.415 ccw(c-6.884,94.415) -6.884,94.542 -13.674,94.542 ccw(c-13.674,94.415) -13.783,94.48 ccw(c-13.719,94.37)
  text "BOOTLEG-2" at -119.507,20.193 h5
  text "Rev B1" at -135.509,18.034 h2
  text "by 4pplet" at -119.507,18.034 h2

## Silkscreen, mask and mechanical layers (free items; w line width, h text height)
Top Overlay:
  text "RESET" at -7.245,69.469 h2
outline:
  lines w0.1: -284.856,36.449 -284.856,92.415 cw(c-282.856,92.415) -282.856,94.415 -275.856,94.415 ccw(c-272.706,95.149) -269.556,94.415 -189.056,94.415 ccw(c-185.906,95.149) -182.756,94.415 -102.256,94.415 ccw(c-99.106,95.149) -95.956,94.415 -23.559,94.415 ; -284.856,36.565 -284.856,2.215 ccw(c-282.856,2.215) -282.856,0.215 -275.856,0.215 cw(c-272.706,-0.52) -269.556,0.215 -189.056,0.215 cw(c-185.906,-0.52) -182.756,0.215 -102.256,0.215 cw(c-99.106,-0.52) -95.956,0.215 -15.456,0.215 cw(c-12.306,-0.52) -9.156,0.215 -2.156,0.215 ccw(c-2.156,2.215) -0.156,2.215 -0.156,40.103 -0.156,92.415 ccw(c-2.156,92.415) -2.156,94.415 -7.156,94.415 ; -279.533,37.719 -279.533,37.795 ; -24.214,94.415 -13.483,94.415 ccw(c-10.333,95.149) -7.183,94.415
Mechanical 2:
  lines w0.2: -23.247,90.17 -23.247,93.091 cw(c-22.358,93.091) -22.358,93.98 -14.224,93.98 cw(c-14.224,92.964) -13.208,92.964 -13.208,92.329 ; -23.241,90.17 cw(c-24.511,90.17) -24.511,88.9 -27.686,88.9 ccw(c-27.686,85.834) -29.854,88.002 -33.392,84.464 ccw(c-31.224,82.296) -34.29,82.296 -34.29,80.899 -34.29,76.581 ccw(c-33.02,76.581) -33.02,75.311 -13.164,75.311 cw(c-13.164,73.577) -11.938,74.803 ccw(c-11.018,75.723) -11.018,74.422 -8.763,74.422 cw(c-8.763,71.356) -6.595,73.524 -6.101,73.03 ccw(c-3.943,75.188) -3.943,72.136 -1.651,72.136 ccw(c-1.651,73.406) -0.381,73.406 -0.381,88.646 ccw(c-1.651,88.646) -1.651,89.916 -11.938,89.916 cw(c-11.938,91.186) -13.208,91.186 -13.208,92.583
Mechanical 16:
  drawing of 560 lines, arcs and shapes, not listed

## Dimensions
-0.156,92.415 to -284.856,92.415 on top dimensions
-9.156,0.215 to -7.183,94.415 on top dimensions
-0.156,92.415 to -284.856,92.415 on bot dimensions
-9.156,0.215 to -2.156,94.415 on bot dimensions

## Text inside footprints (layer, text, board x,y; h text height)
CON301: Mechanical 15 "connector edge" at -15.256,95.25 h1 r180
S262: Mechanical 16 "6.25U" at -188.77,5.615 h1.52 r270; Mechanical 16 "7U" at -208.337,7.365 h1.52 r270